# Altium PCB CPLD-V.PcbDoc (part 2 of 2)
Units mm, origin at the board's own origin, x right, y up, seen from the top; angles counter-clockwise.
Board outline 69.85 x 107.95 mm, 4 copper layers (Top Layer, Layer 1, Layer 2, Bottom Layer), stack 1.803 mm thick; 157 components, 164 nets, 714 pads, 232 vias.
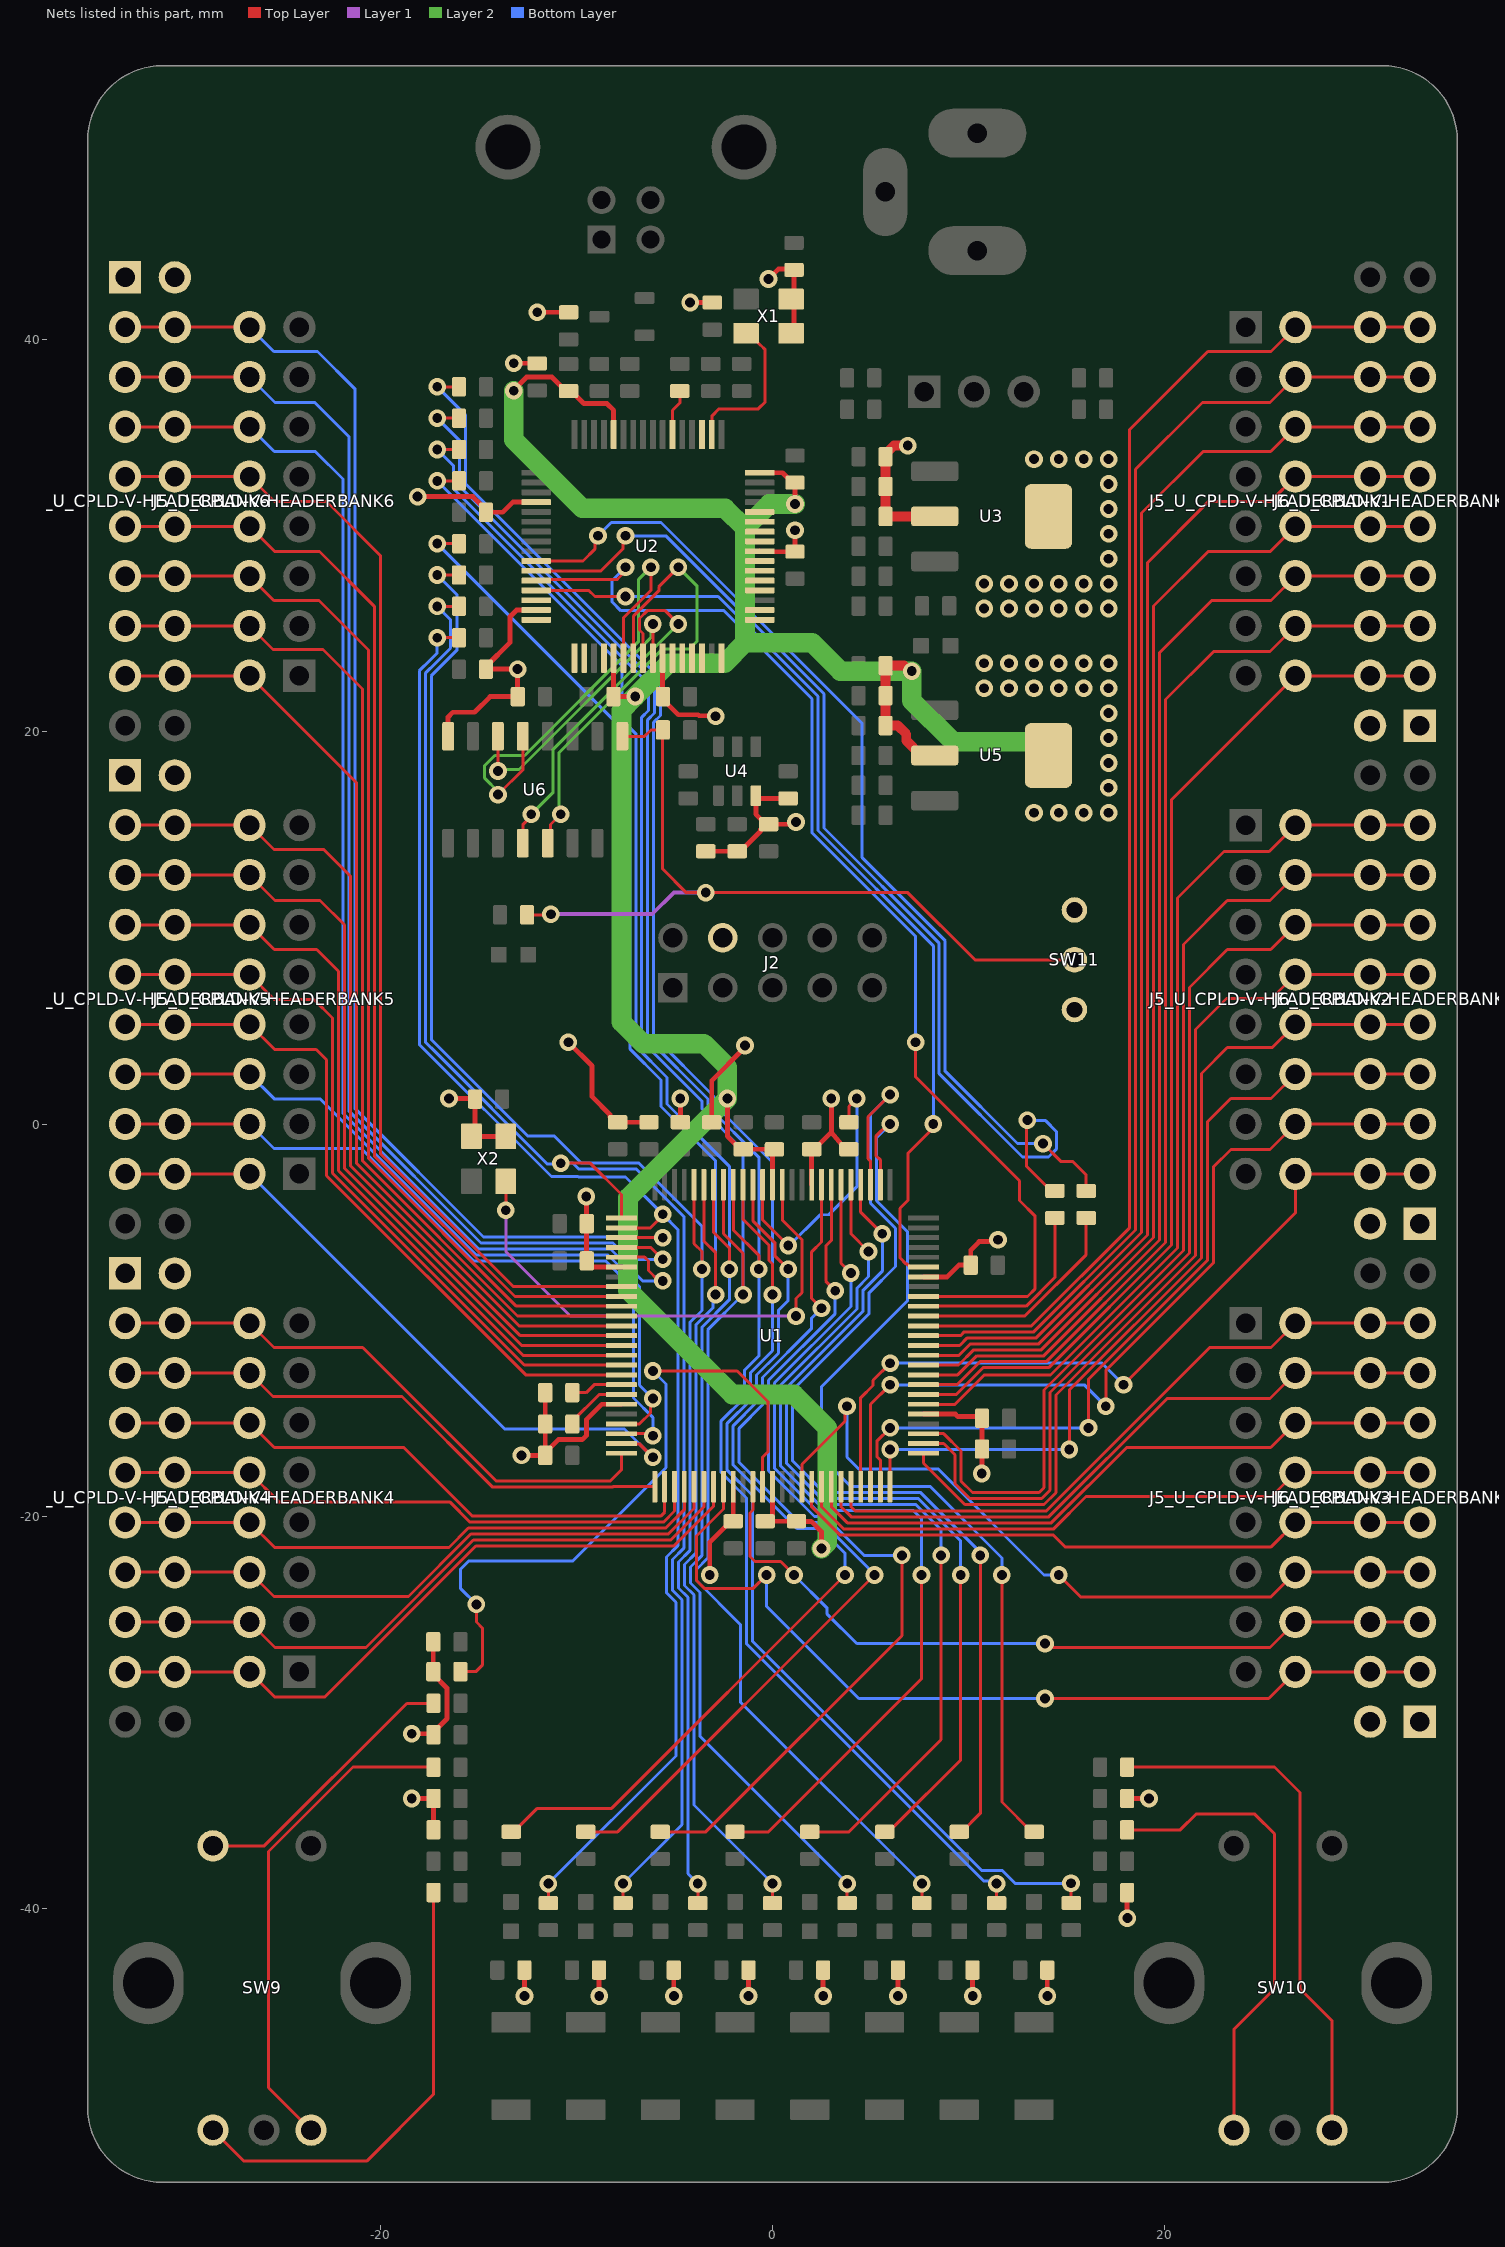
[diagram p4: the nets of this part, all layers, seen from the top]

## Via types
v1: diameter 0.9, hole 0.5, Top Layer to Bottom Layer, tented both sides, 189 vias
v2: diameter 0.9, hole 0.5, Top Layer to Bottom Layer, 43 vias

## Nets (pads, with @x,y where several pads share a name; then routed paths per layer and width w, separated by ;. In a path a pad name is that pad's centre, name@x,y a point inside that pad or via, vN(x,y) a via of type N, cw(c..) or ccw(c..) an arc to the next point about the centre after c; other vN are vias at no path point) (continued)
NetR40_1: R40.1 SW9.A | length 23.6
  Top Layer w0.153: SW9.A@-28.535,-51.315 -26.95,-52.9 -20.7,-52.9 -17.29,-49.49 R40.1@-17.29,-39.2
NetR41_1: R41.1 SW10.A | length 24.2
  Top Layer w0.153: R41.1@18.09,-36.001 20.799,-36.001 21.6,-35.2 24.6,-35.2 25.6,-36.2 25.6,-44.1 23.535,-46.165 SW10.A@23.535,-51.315
NetR42_1: R42.1 U1.62 | length 35.4
  Top Layer w0.152: R42.1@-15.92,-27.934 -15.134,-27.934 -14.8,-27.6 -14.8,-25.7 -15.1,-25.4 v2(-15.1,-24.5) ; v1(-6.1,-12.6) -1.8,-12.6 -0.222,-14.178 -0.222,-16.706 -0.5,-16.984 U1.62@-0.5,-18.495
  Bottom Layer w0.152: v2(-15.1,-24.5) -15.9,-23.7 -15.9,-22.7 -15.5,-22.3 -10.203,-22.3 -5.434,-17.531 -5.434,-17.293 -5.422,-17.281 -5.422,-13.719 -5.434,-13.707 -5.434,-13.266 v1(-6.1,-12.6)
NetR43_1: R43.1 U1.44 | length 3.2
  Top Layer w0.153: R43.1@-10.21,-15.3 -10.21,-15.165 -8.84,-13.795 U1.44@-7.7,-13.795
NetR44_1: R44.1 U1.43 | length 2.7
  Top Layer w0.153: R44.1@-10.21,-13.7 -9.5,-13.7 -9.095,-13.295 U1.43@-7.7,-13.295
NetR45_1: R45.1 R46.2 SW11.2 U6.9 | length 41.8
  Top Layer w0.153: R46.2@-12.518,10.668 -11.332,10.668 v1(-11.3,10.7) ; U6.9@-7.655,19.775 -6.525,19.775 -6.2,20.1 R45.1@-5.59,20.1 -5.6,20.09 -5.6,13 -4.4,11.8 v1(-3.4,11.8) 6.9,11.8 10.325,8.375 SW11.2@15.4,8.375
  Layer 1 w0.2: v1(-11.3,10.7) -6.131,10.7 -5.031,11.8 v1(-3.4,11.8)
NetR48_1: R48.1 U2.6 | length 2.4
  Top Layer w0.153: U2.6@-5.1,35.164 -5.1,36.4 -4.725,36.775 R48.1@-4.725,37.385
NetR49_1: R49.1 SW9.B | length 25.3
  Top Layer w0.153: SW9.B@-23.535,-51.315 -25.7,-49.15 -25.7,-37.1 -21.4,-32.8 R49.1@-17.29,-32.8
NetR50_1: R50.1 SW9.1 | length 14.3
  Top Layer w0.153: SW9.1@-28.535,-36.815 -25.915,-36.815 -18.9,-29.8 -18.65,-29.55 R50.1@-17.29,-29.55
NetR51_1: R51.1 SW10.B | length 27.2
  Top Layer w0.153: R51.1@18.09,-32.8 25.6,-32.8 26.9,-34.1 26.9,-44.1 28.535,-45.735 SW10.B@28.535,-51.315
NetR60_2: R60.2 U1.90 | length 11.5
  Top Layer w0.153: U1.90@7.7,-9.795 12.868,-9.795 16,-6.663 R60.2@16,-4.79
NetR61_2: R61.2 U1.91 | length 10.3
  Top Layer w0.153: U1.91@7.7,-9.295 12.936,-9.295 14.4,-7.831 R61.2@14.4,-4.79
NetR62_1: R62.1 U1.14 | length 14.3
  Top Layer w0.152: U1.14@-0.5,-3.095 -0.5,-4.9 v1(0.8,-6.2) ; R62.1@3.9,0.09 3.9,0.9 v1(4.3,1.3)
  Bottom Layer w0.152: v1(0.8,-6.2) 0.859,-6.2 2.431,-4.628 2.872,-4.628 4.3,-3.2 v1(4.3,1.3)
NetSW11_3: SW11.3
NetU1_12: U1.12 X2.3 | length 27
  Top Layer w0.152: X2.3@-13.603,-2.928 -13.6,-2.931 v1(-13.6,-4.4) ; U1.12@0.5,-3.095 0.5,-4.9 1.5,-5.9 1.5,-8.6 1.2,-8.9 v1(1.2,-9.8)
  Layer 1 w0.152: v1(-13.6,-4.4) -13.6,-6.5 -10.3,-9.8 v1(1.2,-9.8)
NetU2_2: U2.2 X1.3 | length 7.9
  Top Layer w0.153: U2.2@-3.1,35.164 -3.077,35.187 -3.077,36.123 -2.725,36.475 -0.725,36.475 -0.375,36.825 -0.375,39.493 -0.612,39.73 -0.63,39.73 -1.225,40.325 X1.3@-1.35,40.325
NetU2_3: U2.3
NetU2_30: U2.30
NetU2_32: U2.32
NetU2_33: U2.33
NetU2_34: U2.34
NetU2_36: U2.36
NetU2_43: U2.43
NetU2_44: U2.44
NetU2_45: U2.45
NetU2_46: U2.46
NetU2_48: U2.48
NetU2_49: U2.49
NetU2_50: U2.50
NetU2_52: U2.52
NetU2_53: U2.53
NetU2_54: U2.54
NetU2_55: U2.55
NetU2_57: U2.57
NetU2_58: U2.58
NetU2_59: U2.59
NetU2_60: U2.60
P1V8D: C1.1 C2.1 C3.1 C22.1 C23.1 C24.1 C25.1 C26.1 C27.1 C28.1 U1.13 U1.63 U2.12 U2.37 U2.64 U5.2 U5.4 | length 139.4
  Top Layer w0.25: v1(-13.2,37.4) -13.2,37.437 -12.537,38.1 -11.25,38.1 -10.535,37.385 C3.1@-10.4,37.385 -10.265,37.385 -9.628,36.748 -8.448,36.748 -8.1,36.4 U2.12@-8.1,35.164 ; v1(-2.3,1.3) -2.3,-0.625 -1.635,-1.29 C27.1@-1.5,-1.29 C26.1@0.1,-1.29 0,-1.39 U1.13@0,-3.095 ; U2.64@-0.65,33.214 0.511,33.214 1.015,32.71 C1.1@1.15,32.71 v1(1.15,31.622) ; C25.1@-0.375,-20.26 C25.1@-0.24,-20.26 ; U1.63@0,-18.495 0,-20.02 C25.1@-0.24,-20.26 ; v1(2.5,-21.65) 2.5,-20.791 1.975,-20.266 1.231,-20.266 C28.1@1.225,-20.26 C25.1@-0.24,-20.26
  Top Layer w0.254: C2.1@-8.105,21.805 -8.1,21.8 v1(-7,21.8) ; C2.1@-8.105,22.005 -8.105,23.759 U2.37@-8.1,23.764
  Top Layer w0.5: C24.1@5.77,23.1 C22.1@5.77,20.32 6.388,20.32 6.826,19.882 6.826,19.546 7.576,18.796 U5.2@8.276,18.796 ; C24.1@5.77,23.368 5.77,23.287 5.783,23.287 5.88,23.384 6.708,23.384 6.992,23.1 v1(7.1,23.1)
  Layer 2 w1: v1(-13.2,37.4) -13.2,34.9 -9.7,31.4 -2.414,31.4 -1.4,30.386 ; v1(1.15,31.622) -0.164,31.622 -1.4,30.386 ; v1(2.5,-21.65) 2.802,-21.348 2.802,-15.502 1.096,-13.796 -2.045,-13.796 -7.37,-8.472 -7.37,-3.77 v1(-2.3,1.3) -2.3,2.9 -3.5,4.1 -6.6,4.1 -7.7,5.2 -7.7,21.1 v1(-7,21.8) -5.304,23.496 -2.45,23.496 -1.4,24.546 ; 13.8,19.4 13.6,19.4 13.5,19.5 9.2,19.5 7.1,21.6 v1(7.1,23.1) 3.46,23.1 2.015,24.546 -1.4,24.546 ; -1.4,24.546 -1.4,30.386
  other v2: 13.335,15.875 14.605,15.875 15.875,15.875 17.145,15.875 17.145,17.145 17.145,18.415 17.145,19.685 17.145,20.955 10.795,22.225 12.065,22.225 13.335,22.225 14.605,22.225 15.875,22.225 17.145,22.225 10.795,23.495 12.065,23.495 13.335,23.495 14.605,23.495 15.875,23.495 17.145,23.495
P3V3D: C4.1 C5.1 C6.1 C7.1 C11.1 C15.1 C16.1 C17.1 C18.1 C29.1 C30.1 C31.1 C32.1 C33.1 C35.1 C36.1 C37.1 C44.1 C45.1 FB1.2 FB2.2 J2.4 J6_U_CPLD-V-HEADERBANK1.1 J6_U_CPLD-V-HEADERBANK1.2 J6_U_CPLD-V-HEADERBANK2.1 J6_U_CPLD-V-HEADERBANK2.2 J6_U_CPLD-V-HEADERBANK3.1 J6_U_CPLD-V-HEADERBANK3.2 J6_U_CPLD-V-HEADERBANK4.1 J6_U_CPLD-V-HEADERBANK4.2 J6_U_CPLD-V-HEADERBANK5.1 J6_U_CPLD-V-HEADERBANK5.2 J6_U_CPLD-V-HEADERBANK6.1 J6_U_CPLD-V-HEADERBANK6.2 R1.2 R2.1 R11.1 R12.1 R13.1 R14.1 R15.1 R16.1 R17.1 R18.1 R19.1 R20.1 R21.1 R23.1 R24.1 R25.1 R26.1 R35.1 R36.1 R37.1 R38.1 R39.1 R42.2 R43.2 R44.2 R62.2 SW11.1 U1.9 U1.31 U1.45 U1.59 U1.80 U1.94 U2.20 U2.31 U2.42 U2.56 U3.2 U3.4 U4.6 U6.16 X1.1 X1.4 X2.1 X2.4 | length 125.6
  Top Layer w0.153: C6.1@-5.6,22.01 C6.1@-5.59,22
  Top Layer w0.25: v1(-18.4,-34.4) R35.1@-17.29,-34.4 R36.1@-17.29,-36 ; v1(-18.4,-31.1) -17.34,-31.1 R37.1@-17.29,-31.15 -17.29,-31.015 -16.6,-30.325 -16.6,-28.769 -17.3,-28.069 R42.2@-17.3,-27.934 R1.2@-17.3,-26.41 ; v1(-18.1,32) -15.282,32 -14.901,31.619 -14.61,31.328 C4.1@-14.61,31.2 -13.757,31.2 -13.243,31.714 U2.20@-12.05,31.714 ; U6.16@-16.545,19.775 -16.545,20.755 -16.3,21 -15.2,21 -14.4,21.8 C44.1@-12.99,21.8 -13,21.81 v1(-13,23.2) C5.1@-14.605,23.2 ; v1(-16.5,1.3) -15.198,1.3 C45.1@-15.168,1.27 -15.168,-0.443 X2.1@-15.353,-0.628 X2.4@-13.603,-0.628 ; C5.1@-14.61,23.2 -14.61,23.335 -13.381,24.564 -13.381,25.883 -13.05,26.214 U2.31@-12.05,26.214 ; v1(-13.2,38.8) -12.01,38.8 R2.1@-12,38.79 ; v1(-12.8,-16.9) C31.1@-11.59,-16.9 ; v1@-12.66,-44.125 -12.657,-44.123 -12.657,-43.153 R14.1@-12.655,-43.15 ; v1(-12,41.4) FB1.2@-10.4,41.4 ; R44.2@-11.59,-13.7 -11.59,-16.765 -10.925,-16.1 -9.7,-16.1 -9.477,-15.877 -9.477,-15.062 -8.71,-14.295 U1.45@-7.7,-14.295 ; v1(-10.41,4.169) -9.2,2.959 -9.2,1.39 -8.295,0.485 -8.295,0.35 -8.035,0.09 R24.1@-7.9,0.09 R26.1@-6.3,0.09 ; v1(-9.5,-3.7) -9.485,-3.715 -9.485,-6.97 C30.1@-9.47,-6.985 ; C30.1@-9.47,-7.035 -9.21,-7.295 U1.31@-7.7,-7.295 ; v1@-8.85,-44.125 -8.847,-44.123 -8.847,-43.153 R15.1@-8.845,-43.15 ; C6.1@-5.6,22.01 U2.42@-5.6,23.764 ; C6.1@-5.59,21.8 -5.59,21.665 -4.975,21.05 -4.797,20.872 -3.788,20.872 -3.739,20.824 -3.6,20.824 -2.924,20.824 v1(-2.9,20.8) ; v1@-5.04,-44.125 -5.037,-44.123 -5.037,-43.153 R16.1@-5.035,-43.15 ; R25.1@-4.7,0.09 v1(-4.7,1.3) ; v1(-4.2,41.9) FB2.2@-3.075,41.9 ; R12.1@-3.4,13.91 -1.63,13.91 -0.61,14.93 -0.61,15.015 -0.335,15.29 -0.85,15.805 U4.6@-0.85,16.75 -0.71,16.61 R11.1@0.8,16.61 ; v1(-3.2,-23) -3.2,-21.325 -2.135,-20.26 C32.1@-2,-20.26 U1.59@-2,-18.495 ; R23.1@-3.1,0.09 -3.1,2.211 -1.4,3.911 v1(-1.4,4) ; v1@-1.23,-44.125 -1.227,-44.123 -1.227,-43.153 R17.1@-1.225,-43.15 ; U2.56@-0.65,29.214 -0.62,29.184 1.114,29.184 C7.1@1.143,29.155 ; C11.1@-0.2,15.29 0.99,15.29 1.1,15.4 v1(1.2,15.4) ; v1(-0.2,43.1) 0.3,43.6 1.06,43.6 C18.1@1.1,43.56 1.1,40.475 X1.4@0.95,40.325 ; C7.1@1.15,29.19 v1(1.15,30.278) ; U1.9@2,-3.095 C29.1@2,-1.29 2.135,-1.29 3,-0.425 ; v1@2.58,-44.125 2.583,-44.123 2.583,-43.153 R18.1@2.585,-43.15 ; v1(3,1.3) 3,-0.425 ; R62.2@3.9,-1.29 3.53,-1.055 3,-0.425 ; v1@6.39,-44.125 6.393,-44.123 6.393,-43.153 R19.1@6.395,-43.15 ; U1.80@7.7,-14.795 9.325,-14.795 9.448,-14.918 10.603,-14.918 C37.1@10.685,-15 C33.1@10.685,-16.575 10.685,-17.535 10.742,-17.592 10.742,-17.758 v1(10.675,-17.825) ; U1.94@7.7,-7.795 8.905,-7.795 9.5,-7.2 C35.1@10.11,-7.2 10.11,-6.43 10.54,-6 11.41,-6 11.5,-5.91 v1(11.5,-5.9) ; v1@10.2,-44.125 10.203,-44.123 10.203,-43.153 R20.1@10.205,-43.15 ; v1@14.01,-44.125 14.013,-44.123 14.013,-43.153 R21.1@14.015,-43.15 ; R39.1@18.09,-39.201 18.09,-40.5 v1(18.1,-40.5) ; R38.1@18.09,-34.401 19.199,-34.401 v1(19.2,-34.4)
  Top Layer w0.5: v1(6.9,34.6) 6.199,34.6 5.77,34.171 C16.1@5.77,32.512 C15.1@5.77,30.988 U3.2@8.276,30.988
  other v1: -12.65,-44.475 -8.84,-44.475 -5.03,-44.475 -1.22,-44.475 2.59,-44.475 6.4,-44.475 10.21,-44.475 14.02,-44.475
  other v2: 10.795,26.289 12.065,26.289 13.335,26.289 14.605,26.289 15.875,26.289 17.145,26.289 10.795,27.559 12.065,27.559 13.335,27.559 14.605,27.559 15.875,27.559 17.145,27.559 17.145,28.829 17.145,30.099 17.145,31.369 17.145,32.639 13.335,33.909 14.605,33.909 15.875,33.909 17.145,33.909
PIN2: R52.2 U1.2 | length 49.4
  Top Layer w0.153: U1.2@5.5,-3.095 5.5,-1.828 5.273,-1.601 5.273,-0.628 5.901,0 v1(6,0) ; v1(11.7,-23) 11.7,-34.583 13.215,-36.098 R52.2@13.35,-36.098
  Bottom Layer w0.153: v1(6,0) 5.3,-0.7 5.3,-3.909 6.879,-5.488 6.879,-9.021 2.49,-13.41 2.49,-16.979 4.009,-18.499 8.058,-18.499 11.7,-22.14 v1(11.7,-23)
PIN3: R53.2 U1.3 | length 53.2
  Top Layer w0.153: U1.3@5,-3.095 5,-1.899 4.869,-1.768 4.869,0.369 v1(6,1.5) ; R53.2@9.525,-36.098 9.66,-36.098 10.6,-35.158 v1(10.6,-22)
  Bottom Layer w0.153: v1(6,1.5) 4.995,0.495 4.995,-4.035 6.279,-5.319 6.279,-7.262 4.915,-8.625 4.915,-9.685 1.02,-13.58 1.02,-17.18 2.644,-18.804 7.568,-18.804 10.6,-21.835 v1(10.6,-22)
PIN4: R54.2 U1.4 | length 43.8
  Top Layer w0.153: U1.4@4.5,-3.095 4.5,-4.5 v1(5.6,-5.6) ; R54.2@5.725,-36.098 6,-35.823 6.215,-35.823 9.6,-32.438 v1(9.6,-23)
  Bottom Layer w0.153: v1(5.6,-5.6) 5.6,-7.509 4.61,-8.499 4.61,-9.559 0.715,-13.454 0.715,-17.306 2.518,-19.109 7.442,-19.109 9.6,-21.267 v1(9.6,-23)
PIN5: R55.2 U1.5 | length 45.5
  Top Layer w0.153: R55.2@1.9,-36.098 3.902,-36.098 8.6,-31.4 v1(8.6,-22) ; U1.5@4,-3.095 4,-5.6 v1(4.9,-6.5)
  Bottom Layer w0.153: v1(4.9,-6.5) 4.9,-7.778 4.305,-8.373 4.305,-9.432 0.41,-13.327 0.41,-17.432 2.391,-19.414 7.316,-19.414 8.6,-20.698 v1(8.6,-22)
PIN6: R56.2 U1.6 | length 45.8
  Top Layer w0.153: R56.2@-1.912,-36.098 -0.198,-36.098 7.6,-28.3 v1(7.6,-23) ; U1.6@3.5,-3.095 3.5,-7.1 v1(4,-7.6)
  Bottom Layer w0.153: v1(4,-7.6) 4,-9.306 0.105,-13.201 0.105,-17.559 2.265,-19.719 7.189,-19.719 7.6,-20.129 v1(7.6,-23)
PIN7: R57.2 U1.7 | length 45.5
  Top Layer w0.153: R57.2@-5.725,-36.098 -3.398,-36.098 6.6,-26.1 v1(6.6,-22) ; U1.7@3,-3.095 3,-5.947 2.721,-6.226 2.721,-8.018 3.2,-8.496 v1(3.2,-8.5)
  Bottom Layer w0.153: v1(3.2,-8.5) 3.2,-9.675 -0.2,-13.075 -0.2,-17.685 2.139,-20.024 2.696,-20.024 4.672,-22 v1(6.6,-22)
PIN8: R58.2 U1.8 | length 45.8
  Top Layer w0.153: R58.2@-9.525,-36.098 -7.898,-36.098 v1(5.2,-23) ; v1(2.5,-9.4) 2,-8.9 2,-6.516 2.5,-6.016 U1.8@2.5,-3.095
  Bottom Layer w0.153: v1(2.5,-9.4) 2,-9.9 2,-10.423 -0.505,-12.928 -0.505,-14.324 -1.7,-15.519 -1.7,-17.26 1.369,-20.329 2.569,-20.329 5.2,-22.959 v1(5.2,-23)
PIN15: R59.2 U1.15 | length 47.3
  Top Layer w0.153: R59.2@-13.325,-36.098 -13.19,-36.098 -11.992,-34.9 -8.2,-34.9 v1(3.7,-23) ; U1.15@-1,-3.095 -1,-4.931 0.121,-6.052 0.121,-6.721 v1(0.8,-7.4)
  Bottom Layer w0.153: v1(0.8,-7.4) 0.8,-9 0.305,-9.495 0.305,-11.687 -0.81,-12.802 -0.81,-14.198 -2.005,-15.393 -2.005,-17.386 -1.874,-17.517 1.243,-20.634 2.443,-20.634 3.7,-21.89 v1(3.7,-23)
PIN16: R3.2 R27.2 U1.16 | length 102.6
  Top Layer w0.153: v1(-17.1,37.6) R27.2@-15.99,37.6 ; U1.16@-1.5,-3.095 -1.5,-4.862 -0.184,-6.179 -0.184,-6.957 0,-7.14 v1(0,-8.7) ; v1(15.225,-38.725) 15.225,-39.72 R3.2@15.24,-39.735
  Bottom Layer w0.153: v1(-17.1,37.6) -15.647,36.147 -15.647,32.641 -5.711,22.705 -5.711,20.837 -6.059,20.49 -6.059,4.481 -2.979,1.401 -2.979,1.019 0,-1.96 0,-11.56 -1.115,-12.675 -1.115,-14.071 -2.31,-15.266 -2.31,-17.653 -1.016,-18.947 -1.016,-26.384 10.662,-38.062 11.711,-38.062 12.375,-38.725 v1(15.225,-38.725)
PIN17: R4.2 R28.2 U1.17 | length 95.7
  Top Layer w0.153: v1(-17.1,36) R28.2@-15.99,36 ; U1.17@-2,-3.095 -2,-5.401 -0.7,-6.701 v1(-0.7,-7.4) ; R4.2@11.43,-39.735 v1(11.43,-38.74)
  Bottom Layer w0.153: v1(-17.1,36) -15.952,34.852 -15.952,32.515 -6.016,22.579 -6.016,20.963 -6.364,20.616 -6.364,4.354 -3.284,1.274 -3.284,0.893 -0.7,-1.691 -0.7,-11.829 -1.42,-12.549 -1.42,-13.945 -2.615,-15.14 -2.615,-17.779 -1.321,-19.073 -1.321,-26.51 10.766,-38.597 11.287,-38.597 v1(11.43,-38.74)
PIN18: R5.2 R29.2 U1.18 | length 93.8
  Top Layer w0.153: v1(-17.1,34.4) R29.2@-15.99,34.4 ; U1.18@-2.5,-3.095 -2.5,-5.597 -1.5,-6.597 v1(-1.5,-8.7) ; R5.2@7.62,-39.735 v1(7.62,-38.74)
  Bottom Layer w0.153: v1(-17.1,34.4) -16.257,33.557 -16.257,32.388 -6.321,22.453 -6.321,21.09 -6.669,20.743 -6.669,4.228 -3.589,1.148 -3.589,0.766 -1.5,-1.322 v1(-1.5,-8.7) -3.3,-10.5 -3.3,-12.823 -3.288,-12.835 -3.288,-18.165 -3.3,-18.177 -3.3,-22.14 -3.879,-22.719 -3.879,-23.281 -1.626,-25.533 -1.626,-29.494 v1(7.62,-38.74)
PIN19: R6.2 R30.2 U1.19 | length 88.6
  Top Layer w0.153: v1(-17.1,32.8) R30.2@-15.99,32.8 ; U1.19@-3,-3.095 -3,-5.529 -2.2,-6.329 v1(-2.2,-7.4) ; R6.2@3.81,-39.735 v1(3.81,-38.74)
  Bottom Layer w0.153: v1(-17.1,32.8) -7.679,23.378 -7.679,20.61 -6.974,19.905 -6.974,3.964 -5.379,2.369 -5.379,1.019 -2.2,-2.16 -2.2,-8.969 -3.605,-10.374 -3.605,-12.949 -3.593,-12.961 -3.593,-18.039 -3.605,-18.051 -3.605,-22.014 -4.184,-22.593 -4.184,-23.407 -3.701,-23.889 -3.701,-31.229 v1(3.81,-38.74)
PIN20: R7.2 R31.2 U1.20 | length 84.7
  Top Layer w0.153: v1(-17.1,29.6) R31.2@-15.99,29.6 ; U1.20@-3.5,-3.095 -3.5,-5.971 -2.9,-6.571 v1(-2.9,-8.7) ; R7.2@0,-39.735 v1(0,-38.74)
  Bottom Layer w0.153: v1(-17.1,29.6) -7.279,19.778 -7.279,3.838 -5.684,2.243 -5.684,0.893 -2.9,-1.891 v1(-2.9,-8.7) -3.042,-8.842 -3.042,-9.38 -3.91,-10.247 -3.91,-13.075 -3.898,-13.088 -3.898,-17.912 -3.91,-17.925 -3.91,-21.888 -4.489,-22.466 -4.489,-23.534 -4.006,-24.016 -4.006,-34.734 v1(0,-38.74)
PIN21: R8.2 R32.2 U1.21 | length 83.4
  Top Layer w0.153: v1(-17.1,28) R32.2@-15.99,28 ; U1.21@-4,-3.095 -3.997,-3.097 -3.997,-6.101 -3.6,-6.499 v1(-3.6,-7.4) ; R8.2@-3.81,-39.735 v1(-3.81,-38.74)
  Bottom Layer w0.153: v1(-17.1,28) -16.1,27 -16.1,24.16 -17.4,22.86 -17.4,4.311 -12.467,-0.622 -11.115,-0.622 -9.737,-2 -6.809,-2 -3.6,-5.209 v1(-3.6,-7.4) -3.6,-9.506 -4.215,-10.121 -4.215,-13.202 -4.203,-13.214 -4.203,-17.786 -4.215,-17.798 -4.215,-21.761 -4.794,-22.34 -4.794,-23.66 -4.311,-24.142 -4.311,-38.239 v1(-3.81,-38.74)
PIN26: R9.2 R33.2 U1.26 | length 82.7
  Top Layer w0.153: v1(-17.1,26.4) R33.2@-15.99,26.4 ; v1(-10.8,-2) -9.3,-2 -7.7,-3.6 U1.26@-7.7,-4.795 ; R9.2@-7.62,-39.735 v1(-7.62,-38.74)
  Bottom Layer w0.153: v1(-17.1,26.4) -16.421,25.721 -16.421,24.27 -17.15,23.542 -17.705,22.987 -17.705,4.184 -17.15,3.629 -11.473,-2.048 v1@-10.8,-2.048 ; v1(-10.8,-2) -10.169,-2 -9.864,-2.305 -6.935,-2.305 -4.52,-4.72 -4.52,-13.328 -4.508,-13.34 -4.508,-17.66 -4.52,-17.672 -4.52,-21.635 -5.099,-22.214 -5.099,-23.786 -4.616,-24.268 -4.616,-35.737 v1(-7.62,-38.74)
PIN27: R10.2 R34.2 U1.27 | length 79.3
  Top Layer w0.153: v1(-17.1,24.8) R34.2@-15.99,24.8 ; R10.2@-11.43,-39.735 v1(-11.43,-38.74) ; U1.27@-7.7,-5.295 -6.22,-5.295 -5.6,-4.675 v1(-5.6,-4.6)
  Bottom Layer w0.153: v1(-17.1,24.8) -17.1,24.023 -17.455,23.668 -18.01,23.113 -18.01,4.058 -11.274,-2.679 -9.921,-2.679 -9.9,-2.7 -7.5,-2.7 v1(-5.6,-4.6) -4.825,-5.375 -4.825,-13.454 -4.813,-13.467 -4.813,-17.533 -4.825,-17.546 -4.825,-21.509 -5.404,-22.087 -5.404,-23.913 -4.921,-24.395 -4.921,-32.231 v1(-11.43,-38.74)
PIN28: J5_U_CPLD-V-HEADERBANK6.16 J6_U_CPLD-V-HEADERBANK6.3 J6_U_CPLD-V-HEADERBANK6.4 U1.28 | length 70.3
  Top Layer w0.153: J6_U_CPLD-V-HEADERBANK6.3@-33.02,40.64 J6_U_CPLD-V-HEADERBANK6.4@-30.48,40.64 J5_U_CPLD-V-HEADERBANK6.16@-26.67,40.64 ; U1.28@-7.7,-5.795 -7.698,-5.797 -5.603,-5.797 v1(-5.6,-5.8)
  Bottom Layer w0.153: J5_U_CPLD-V-HEADERBANK6.16@-26.67,40.64 -25.43,39.4 -23.2,39.4 -21.3,37.5 -21.3,0.8 -14.735,-5.765 -8.005,-5.765 -7.97,-5.8 v1(-5.6,-5.8)
PIN29: J5_U_CPLD-V-HEADERBANK6.14 J6_U_CPLD-V-HEADERBANK6.5 J6_U_CPLD-V-HEADERBANK6.6 U1.29 | length 68.6
  Top Layer w0.153: J6_U_CPLD-V-HEADERBANK6.5@-33.02,38.1 J6_U_CPLD-V-HEADERBANK6.6@-30.48,38.1 J5_U_CPLD-V-HEADERBANK6.14@-26.67,38.1 ; U1.29@-7.7,-6.295 -6.205,-6.295 v1(-5.6,-6.9)
  Bottom Layer w0.153: J5_U_CPLD-V-HEADERBANK6.14@-26.67,38.1 -25.37,36.8 -23.343,36.8 -21.605,35.062 -21.605,0.674 -14.861,-6.07 -8.131,-6.07 -7.301,-6.9 v1(-5.6,-6.9)
PIN30: J5_U_CPLD-V-HEADERBANK6.12 J6_U_CPLD-V-HEADERBANK6.7 J6_U_CPLD-V-HEADERBANK6.8 U1.30 | length 67.3
  Top Layer w0.153: J6_U_CPLD-V-HEADERBANK6.7@-33.02,35.56 J5_U_CPLD-V-HEADERBANK6.12@-26.67,35.56 ; U1.30@-7.7,-6.795 -6.519,-6.795 -6.327,-6.987 -6.327,-7.473 -5.8,-8 v1(-5.6,-8)
  Bottom Layer w0.153: J5_U_CPLD-V-HEADERBANK6.12@-26.67,35.56 -25.41,34.3 -23.319,34.3 -21.91,32.891 -21.91,0.547 -14.988,-6.375 -8.257,-6.375 -6.632,-8 v1(-5.6,-8)
PIN33: J5_U_CPLD-V-HEADERBANK6.10 J6_U_CPLD-V-HEADERBANK6.9 J6_U_CPLD-V-HEADERBANK6.10 U1.33 | length 60.3
  Top Layer w0.153: J6_U_CPLD-V-HEADERBANK6.9@-33.02,33.02 J6_U_CPLD-V-HEADERBANK6.10@-30.48,33.02 J5_U_CPLD-V-HEADERBANK6.10@-26.67,33.02 -25.393,31.744 -22.744,31.744 -20,29 -20,-1.5 -13.205,-8.295 U1.33@-7.7,-8.295
PIN34: J5_U_CPLD-V-HEADERBANK6.8 J6_U_CPLD-V-HEADERBANK6.11 J6_U_CPLD-V-HEADERBANK6.12 U1.34 | length 58
  Top Layer w0.153: J6_U_CPLD-V-HEADERBANK6.11@-33.02,30.48 J6_U_CPLD-V-HEADERBANK6.12@-30.48,30.48 J5_U_CPLD-V-HEADERBANK6.8@-26.67,30.48 -25.39,29.2 -23.1,29.2 -20.305,26.405 -20.305,-1.626 -13.136,-8.795 U1.34@-7.7,-8.795
PIN35: J5_U_CPLD-V-HEADERBANK6.6 J6_U_CPLD-V-HEADERBANK6.13 J6_U_CPLD-V-HEADERBANK6.14 U1.35 | length 55.3
  Top Layer w0.153: J6_U_CPLD-V-HEADERBANK6.13@-33.02,27.94 J6_U_CPLD-V-HEADERBANK6.14@-30.48,27.94 J5_U_CPLD-V-HEADERBANK6.6@-26.67,27.94 -25.43,26.7 -23.134,26.7 -20.61,24.176 -20.61,-1.753 -13.068,-9.295 U1.35@-8.373,-9.295
PIN36: J5_U_CPLD-V-HEADERBANK6.4 J6_U_CPLD-V-HEADERBANK6.15 J6_U_CPLD-V-HEADERBANK6.16 U1.36 | length 54
  Top Layer w0.153: J6_U_CPLD-V-HEADERBANK6.15@-33.02,25.4 J6_U_CPLD-V-HEADERBANK6.16@-30.48,25.4 J5_U_CPLD-V-HEADERBANK6.4@-26.67,25.4 -25.47,24.2 -22.924,24.2 -20.915,22.191 -20.915,-1.879 -12.999,-9.795 U1.36@-7.7,-9.795
PIN37: J5_U_CPLD-V-HEADERBANK6.2 J6_U_CPLD-V-HEADERBANK6.17 J6_U_CPLD-V-HEADERBANK6.18 U1.37 | length 50.4
  Top Layer w0.153: J6_U_CPLD-V-HEADERBANK6.17@-33.02,22.86 J6_U_CPLD-V-HEADERBANK6.18@-30.48,22.86 J5_U_CPLD-V-HEADERBANK6.2@-26.67,22.86 -21.22,17.41 -21.22,-2.005 -12.93,-10.295 U1.37@-7.7,-10.295
PIN38: J5_U_CPLD-V-HEADERBANK5.16 J6_U_CPLD-V-HEADERBANK5.3 J6_U_CPLD-V-HEADERBANK5.4 U1.38 | length 44.8
  Top Layer w0.153: J6_U_CPLD-V-HEADERBANK5.3@-33.02,15.24 J6_U_CPLD-V-HEADERBANK5.4@-30.48,15.24 J5_U_CPLD-V-HEADERBANK5.16@-26.67,15.24 -25.43,14 -22.884,14 -21.525,12.641 -21.525,-2.132 -12.862,-10.795 U1.38@-7.7,-10.795
PIN39: J5_U_CPLD-V-HEADERBANK5.14 J6_U_CPLD-V-HEADERBANK5.5 J6_U_CPLD-V-HEADERBANK5.6 U1.39 | length 42.5
  Top Layer w0.153: J6_U_CPLD-V-HEADERBANK5.5@-33.02,12.7 J6_U_CPLD-V-HEADERBANK5.6@-30.48,12.7 J5_U_CPLD-V-HEADERBANK5.14@-26.67,12.7 -25.37,11.4 -23.074,11.4 -21.83,10.156 -21.83,-2.258 -12.793,-11.295 U1.39@-7.7,-11.295
PIN40: J5_U_CPLD-V-HEADERBANK5.12 J6_U_CPLD-V-HEADERBANK5.7 J6_U_CPLD-V-HEADERBANK5.8 U1.40 | length 40.4
  Top Layer w0.153: J6_U_CPLD-V-HEADERBANK5.7@-33.02,10.16 J6_U_CPLD-V-HEADERBANK5.8@-30.48,10.16 J5_U_CPLD-V-HEADERBANK5.12@-26.67,10.16 -25.41,8.9 -23.249,8.9 -22.135,7.786 -22.135,-2.384 -12.724,-11.795 U1.40@-7.7,-11.795
PIN41: J5_U_CPLD-V-HEADERBANK5.10 J6_U_CPLD-V-HEADERBANK5.9 J6_U_CPLD-V-HEADERBANK5.10 U1.41 | length 38.2
  Top Layer w0.153: J6_U_CPLD-V-HEADERBANK5.9@-33.02,7.62 J6_U_CPLD-V-HEADERBANK5.10@-30.48,7.62 J5_U_CPLD-V-HEADERBANK5.10@-26.67,7.62 -25.393,6.344 -23.372,6.344 -22.44,5.411 -22.44,-2.511 -12.656,-12.295 U1.41@-7.7,-12.295
PIN42: J5_U_CPLD-V-HEADERBANK5.8 J6_U_CPLD-V-HEADERBANK5.11 J6_U_CPLD-V-HEADERBANK5.12 U1.42 | length 36.2
  Top Layer w0.153: J6_U_CPLD-V-HEADERBANK5.11@-33.02,5.08 J6_U_CPLD-V-HEADERBANK5.12@-30.48,5.08 J5_U_CPLD-V-HEADERBANK5.8@-26.67,5.08 -25.39,3.8 -23.27,3.8 -22.745,3.275 -22.745,-2.637 -12.587,-12.795 U1.42@-7.7,-12.795
PIN47: J5_U_CPLD-V-HEADERBANK5.6 J6_U_CPLD-V-HEADERBANK5.13 J6_U_CPLD-V-HEADERBANK5.14 U1.47 | length 39.2
  Top Layer w0.153: J6_U_CPLD-V-HEADERBANK5.13@-33.02,2.54 J5_U_CPLD-V-HEADERBANK5.6@-26.67,2.54 ; U1.47@-7.7,-15.295 -7.696,-15.291 -6.78,-15.291 -6.224,-14.735 -6.224,-14.124 v1(-6.1,-14)
  Bottom Layer w0.153: J5_U_CPLD-V-HEADERBANK5.6@-26.67,2.54 -25.412,1.283 -23.077,1.283 -15.114,-6.68 -9.934,-6.68 -8.384,-6.68 -6.779,-8.285 -6.779,-13.321 v1(-6.1,-14)
PIN48: J5_U_CPLD-V-HEADERBANK5.4 J6_U_CPLD-V-HEADERBANK5.15 J6_U_CPLD-V-HEADERBANK5.16 U1.48 | length 39
  Top Layer w0.153: J6_U_CPLD-V-HEADERBANK5.15@-33.02,0 J5_U_CPLD-V-HEADERBANK5.4@-26.67,0 ; U1.48@-7.7,-15.795 -7.698,-15.797 -6.203,-15.797 v1(-6.1,-15.9)
  Bottom Layer w0.153: J5_U_CPLD-V-HEADERBANK5.4@-26.67,0 -25.42,-1.249 -20.976,-1.249 -15.24,-6.985 -8.51,-6.985 -7.084,-8.411 -7.084,-13.976 -6.1,-14.96 v1(-6.1,-15.9)
PIN49: J5_U_CPLD-V-HEADERBANK5.2 J6_U_CPLD-V-HEADERBANK5.17 J6_U_CPLD-V-HEADERBANK5.18 U1.49 | length 34.8
  Top Layer w0.153: J6_U_CPLD-V-HEADERBANK5.17@-33.02,-2.54 J5_U_CPLD-V-HEADERBANK5.2@-26.67,-2.54 ; U1.49@-7.7,-16.295 -7.685,-16.31 -6.79,-16.31 v1(-6.1,-17)
  Bottom Layer w0.153: J5_U_CPLD-V-HEADERBANK5.2@-26.67,-2.54 -13.66,-15.55 -7.55,-15.55 v1(-6.1,-17)
PIN50: J5_U_CPLD-V-HEADERBANK4.16 J6_U_CPLD-V-HEADERBANK4.3 J6_U_CPLD-V-HEADERBANK4.4 U1.50 | length 29.7
  Top Layer w0.153: J6_U_CPLD-V-HEADERBANK4.3@-33.02,-10.16 J6_U_CPLD-V-HEADERBANK4.4@-30.48,-10.16 J5_U_CPLD-V-HEADERBANK4.16@-26.67,-10.16 -25.43,-11.4 -20.9,-11.4 -14.1,-18.2 -8.263,-18.2 -7.7,-17.637 U1.50@-7.7,-16.795
PIN51: J5_U_CPLD-V-HEADERBANK4.14 J6_U_CPLD-V-HEADERBANK4.5 J6_U_CPLD-V-HEADERBANK4.6 U1.51 | length 29.4
  Top Layer w0.153: J6_U_CPLD-V-HEADERBANK4.5@-33.02,-12.7 J6_U_CPLD-V-HEADERBANK4.6@-30.48,-12.7 J5_U_CPLD-V-HEADERBANK4.14@-26.67,-12.7 -25.47,-13.9 -18.9,-13.9 -14.295,-18.505 -8.137,-18.505 -8.127,-18.495 U1.51@-6,-18.495
PIN52: J5_U_CPLD-V-HEADERBANK4.12 J6_U_CPLD-V-HEADERBANK4.7 J6_U_CPLD-V-HEADERBANK4.8 U1.52 | length 30.9
  Top Layer w0.153: J6_U_CPLD-V-HEADERBANK4.7@-33.02,-15.24 J6_U_CPLD-V-HEADERBANK4.8@-30.48,-15.24 J5_U_CPLD-V-HEADERBANK4.12@-26.67,-15.24 -25.41,-16.5 -18.8,-16.5 -15.3,-20 -5.7,-20 -5.5,-19.8 U1.52@-5.5,-18.495
PIN53: J5_U_CPLD-V-HEADERBANK4.10 J6_U_CPLD-V-HEADERBANK4.9 J6_U_CPLD-V-HEADERBANK4.10 U1.53 | length 29.9
  Top Layer w0.153: J6_U_CPLD-V-HEADERBANK4.9@-33.02,-17.78 J6_U_CPLD-V-HEADERBANK4.10@-30.48,-17.78 J5_U_CPLD-V-HEADERBANK4.10@-26.67,-17.78 -25.183,-19.266 -16.465,-19.266 -15.426,-20.305 -5.563,-20.305 -5,-19.742 U1.53@-5,-19.168
PIN54: J5_U_CPLD-V-HEADERBANK4.8 J6_U_CPLD-V-HEADERBANK4.11 J6_U_CPLD-V-HEADERBANK4.12 U1.54 | length 31
  Top Layer w0.153: J6_U_CPLD-V-HEADERBANK4.11@-33.02,-20.32 J6_U_CPLD-V-HEADERBANK4.12@-30.48,-20.32 J5_U_CPLD-V-HEADERBANK4.8@-26.67,-20.32 -25.39,-21.6 -16.5,-21.6 -15.51,-20.61 -5.437,-20.61 -4.5,-19.673 U1.54@-4.5,-18.495
PIN55: J5_U_CPLD-V-HEADERBANK4.6 J6_U_CPLD-V-HEADERBANK4.13 J6_U_CPLD-V-HEADERBANK4.14 U1.55 | length 31.8
  Top Layer w0.153: J6_U_CPLD-V-HEADERBANK4.13@-33.02,-22.86 J6_U_CPLD-V-HEADERBANK4.14@-30.48,-22.86 J5_U_CPLD-V-HEADERBANK4.6@-26.67,-22.86 -25.43,-24.1 -18.569,-24.1 -15.384,-20.915 -5.311,-20.915 -4,-19.604 U1.55@-4,-19.171
PIN56: J5_U_CPLD-V-HEADERBANK4.4 J6_U_CPLD-V-HEADERBANK4.15 J6_U_CPLD-V-HEADERBANK4.16 U1.56 | length 34.1
  Top Layer w0.153: J6_U_CPLD-V-HEADERBANK4.15@-33.02,-25.4 J6_U_CPLD-V-HEADERBANK4.16@-30.48,-25.4 J5_U_CPLD-V-HEADERBANK4.4@-26.67,-25.4 -25.37,-26.7 -20.737,-26.7 -15.257,-21.22 -5.184,-21.22 -3.5,-19.536 U1.56@-3.5,-18.495
PIN57: J5_U_CPLD-V-HEADERBANK4.2 J6_U_CPLD-V-HEADERBANK4.17 J6_U_CPLD-V-HEADERBANK4.18 U1.57 | length 35.6
  Top Layer w0.153: J6_U_CPLD-V-HEADERBANK4.17@-33.02,-27.94 J6_U_CPLD-V-HEADERBANK4.18@-30.48,-27.94 J5_U_CPLD-V-HEADERBANK4.2@-26.67,-27.94 -25.395,-29.215 -22.821,-29.215 -15.131,-21.525 -5.03,-21.525 -3.003,-19.497 -3.003,-18.497 U1.57@-3,-18.495
PIN58: J5_U_CPLD-V-HEADERBANK3.16 J6_U_CPLD-V-HEADERBANK3.3 J6_U_CPLD-V-HEADERBANK3.4 U1.58 | length 46.8
  Top Layer w0.153: U1.58@-2.5,-18.495 -2.502,-18.498 -2.502,-19.637 -3.879,-21.013 -3.879,-23.281 -3.481,-23.679 -0.979,-23.679 v1(-0.3,-23) ; v1(13.9,-29.3) 25.31,-29.3 J5_U_CPLD-V-HEADERBANK3.16@26.67,-27.94 J6_U_CPLD-V-HEADERBANK3.4@30.48,-27.94 J6_U_CPLD-V-HEADERBANK3.3@33.02,-27.94
  Bottom Layer w0.153: v1(-0.3,-23) -0.3,-24.6 4.4,-29.3 v1(13.9,-29.3)
PIN61: J5_U_CPLD-V-HEADERBANK3.14 J6_U_CPLD-V-HEADERBANK3.5 J6_U_CPLD-V-HEADERBANK3.6 U1.61 | length 40.4
  Top Layer w0.153: U1.61@-1,-18.495 -1,-19.691 -1.147,-19.838 -1.147,-22.062 -0.892,-22.317 0.417,-22.317 v1(1.1,-23) ; v1(13.9,-26.5) 14.102,-26.5 14.302,-26.7 25.37,-26.7 J5_U_CPLD-V-HEADERBANK3.14@26.67,-25.4 J6_U_CPLD-V-HEADERBANK3.6@30.48,-25.4 J6_U_CPLD-V-HEADERBANK3.5@33.02,-25.4
  Bottom Layer w0.153: v1(1.1,-23) 2.771,-24.671 2.771,-24.971 4.3,-26.5 v1(13.9,-26.5)
PIN66: J5_U_CPLD-V-HEADERBANK3.12 J6_U_CPLD-V-HEADERBANK3.7 J6_U_CPLD-V-HEADERBANK3.8 U1.66 | length 40.3
  Top Layer w0.153: U1.66@1.5,-18.495 1.5,-17.36 3.704,-15.156 3.704,-14.496 v1(3.8,-14.4) ; v1(14.6,-23) 15.735,-24.135 25.395,-24.135 J5_U_CPLD-V-HEADERBANK3.12@26.67,-22.86 J6_U_CPLD-V-HEADERBANK3.8@30.48,-22.86 J6_U_CPLD-V-HEADERBANK3.7@33.02,-22.86
  Bottom Layer w0.153: v1(3.8,-14.4) 3.8,-16.995 4.388,-17.584 8.437,-17.584 13.854,-23 v1(14.6,-23)
PIN67: J5_U_CPLD-V-HEADERBANK3.10 J6_U_CPLD-V-HEADERBANK3.9 J6_U_CPLD-V-HEADERBANK3.10 U1.67 | length 33.4
  Top Layer w0.153: U1.67@2,-18.495 2,-19.524 3.426,-20.95 14.309,-20.95 14.943,-21.584 25.406,-21.584 J5_U_CPLD-V-HEADERBANK3.10@26.67,-20.32 J6_U_CPLD-V-HEADERBANK3.10@30.48,-20.32 J6_U_CPLD-V-HEADERBANK3.9@33.02,-20.32
PIN68: J5_U_CPLD-V-HEADERBANK3.8 J6_U_CPLD-V-HEADERBANK3.11 J6_U_CPLD-V-HEADERBANK3.12 U1.68 | length 33.2
  Top Layer w0.153: U1.68@2.5,-18.495 2.5,-19.524 3.621,-20.645 14.349,-20.645 15.994,-19 25.45,-19 J5_U_CPLD-V-HEADERBANK3.8@26.67,-17.78 J6_U_CPLD-V-HEADERBANK3.12@30.48,-17.78 J6_U_CPLD-V-HEADERBANK3.11@33.02,-17.78
PIN69: J5_U_CPLD-V-HEADERBANK3.6 J6_U_CPLD-V-HEADERBANK3.13 J6_U_CPLD-V-HEADERBANK3.14 U1.69 | length 33.5
  Top Layer w0.153: U1.69@3,-18.495 3,-19.524 3.816,-20.34 14.223,-20.34 18.063,-16.5 25.41,-16.5 J5_U_CPLD-V-HEADERBANK3.6@26.67,-15.24 J6_U_CPLD-V-HEADERBANK3.14@30.48,-15.24 J6_U_CPLD-V-HEADERBANK3.13@33.02,-15.24
PIN70: J5_U_CPLD-V-HEADERBANK3.4 J6_U_CPLD-V-HEADERBANK3.15 J6_U_CPLD-V-HEADERBANK3.16 U1.70 | length 33.8
  Top Layer w0.153: U1.70@3.5,-18.495 3.5,-19.524 4.011,-20.035 14.096,-20.035 20.131,-14 25.37,-14 J5_U_CPLD-V-HEADERBANK3.4@26.67,-12.7 J6_U_CPLD-V-HEADERBANK3.16@30.48,-12.7 J6_U_CPLD-V-HEADERBANK3.15@33.02,-12.7
PIN71: J5_U_CPLD-V-HEADERBANK3.2 J6_U_CPLD-V-HEADERBANK3.17 J6_U_CPLD-V-HEADERBANK3.18 U1.71 | length 34.1
  Top Layer w0.153: U1.71@4,-18.495 4,-19.525 4.206,-19.73 13.97,-19.73 22.3,-11.4 25.43,-11.4 J5_U_CPLD-V-HEADERBANK3.2@26.67,-10.16 J6_U_CPLD-V-HEADERBANK3.18@30.48,-10.16 J6_U_CPLD-V-HEADERBANK3.17@33.02,-10.16
PIN72: J5_U_CPLD-V-HEADERBANK2.16 J6_U_CPLD-V-HEADERBANK2.3 J6_U_CPLD-V-HEADERBANK2.4 U1.72 | length 40
  Top Layer w0.153: U1.72@4.5,-18.495 4.5,-13.96 5.128,-13.332 5.128,-13.072 v1(6,-12.2) ; v1(17.9,-13.3) 26.67,-4.53 J5_U_CPLD-V-HEADERBANK2.16@26.67,-2.54 J6_U_CPLD-V-HEADERBANK2.4@30.48,-2.54 J6_U_CPLD-V-HEADERBANK2.3@33.02,-2.54
  Bottom Layer w0.153: v1(6,-12.2) 16.8,-12.2 v1(17.9,-13.3)
PIN73: J5_U_CPLD-V-HEADERBANK2.14 J6_U_CPLD-V-HEADERBANK2.5 J6_U_CPLD-V-HEADERBANK2.6 U1.73 | length 43
  Top Layer w0.153: U1.73@5,-18.495 5,-14.3 v1(6,-13.3) ; v1(17.001,-14.4) 17.001,-12.568 22.485,-7.084 22.485,-2.195 23.38,-1.3 25.37,-1.3 J5_U_CPLD-V-HEADERBANK2.14@26.67,0 J6_U_CPLD-V-HEADERBANK2.6@30.48,0 J6_U_CPLD-V-HEADERBANK2.5@33.02,0
  Bottom Layer w0.153: v1(6,-13.3) 15.901,-13.3 v1(17.001,-14.4)
PIN74: J5_U_CPLD-V-HEADERBANK2.12 J6_U_CPLD-V-HEADERBANK2.7 J6_U_CPLD-V-HEADERBANK2.8 U1.74 | length 43.4
  Top Layer w0.153: U1.74@5.5,-18.495 5.5,-17.134 5.321,-16.956 5.321,-16.179 v1(6,-15.5) ; v1(16.121,-15.5) 16.121,-13.017 22.18,-6.958 22.18,0.107 23.373,1.3 25.43,1.3 J5_U_CPLD-V-HEADERBANK2.12@26.67,2.54 J6_U_CPLD-V-HEADERBANK2.8@30.48,2.54 J6_U_CPLD-V-HEADERBANK2.7@33.02,2.54
  Bottom Layer w0.153: v1(6,-15.5) v1(16.121,-15.5)
PIN75: J5_U_CPLD-V-HEADERBANK2.10 J6_U_CPLD-V-HEADERBANK2.9 J6_U_CPLD-V-HEADERBANK2.10 U1.75 | length 45.2
  Top Layer w0.153: U1.75@6,-18.495 v1(6,-16.6) ; v1(15.137,-16.6) 15.137,-13.569 21.875,-6.831 21.875,2.575 23.2,3.9 25.49,3.9 J5_U_CPLD-V-HEADERBANK2.10@26.67,5.08 J6_U_CPLD-V-HEADERBANK2.10@30.48,5.08 J6_U_CPLD-V-HEADERBANK2.9@33.02,5.08
  Bottom Layer w0.153: v1(6,-16.6) v1(15.137,-16.6)
PIN76: J5_U_CPLD-V-HEADERBANK2.8 J6_U_CPLD-V-HEADERBANK2.11 J6_U_CPLD-V-HEADERBANK2.12 U1.76 | length 47.6
  Top Layer w0.153: U1.76@7.7,-16.795 7.7,-17.3 9.81,-19.41 12.312,-19.41 13.853,-19.41 14.458,-18.804 14.458,-17.264 14.458,-13.817 21.57,-6.705 21.57,4.816 23.154,6.4 25.45,6.4 J5_U_CPLD-V-HEADERBANK2.8@26.67,7.62 J6_U_CPLD-V-HEADERBANK2.12@30.48,7.62 J6_U_CPLD-V-HEADERBANK2.11@33.02,7.62
PIN77: J5_U_CPLD-V-HEADERBANK2.6 J6_U_CPLD-V-HEADERBANK2.13 J6_U_CPLD-V-HEADERBANK2.14 U1.77 | length 50.3
  Top Layer w0.153: U1.77@7.7,-16.295 8.729,-16.295 9.31,-16.876 9.31,-17.851 9.31,-18.341 9.974,-19.005 10.074,-19.105 12.186,-19.105 13.726,-19.105 14.153,-18.678 14.153,-17.137 14.153,-13.69 21.265,-6.579 21.265,6.965 23.2,8.9 25.41,8.9 J5_U_CPLD-V-HEADERBANK2.6@26.67,10.16 J6_U_CPLD-V-HEADERBANK2.14@30.48,10.16 J6_U_CPLD-V-HEADERBANK2.13@33.02,10.16
PIN78: J5_U_CPLD-V-HEADERBANK2.4 J6_U_CPLD-V-HEADERBANK2.15 J6_U_CPLD-V-HEADERBANK2.16 U1.78 | length 52.6
  Top Layer w0.153: U1.78@7.7,-15.795 8.73,-15.795 9.615,-16.681 9.615,-18.215 10.2,-18.8 13.6,-18.8 13.848,-18.552 13.848,-13.564 20.96,-6.452 20.96,9.16 23.2,11.4 25.37,11.4 J5_U_CPLD-V-HEADERBANK2.4@26.67,12.7 J6_U_CPLD-V-HEADERBANK2.16@30.48,12.7 J6_U_CPLD-V-HEADERBANK2.15@33.02,12.7
PIN81: J5_U_CPLD-V-HEADERBANK2.2 J6_U_CPLD-V-HEADERBANK2.17 J6_U_CPLD-V-HEADERBANK2.18 U1.81 | length 48
  Top Layer w0.153: U1.81@7.7,-14.295 9.305,-14.295 10.8,-12.8 14.181,-12.8 20.655,-6.326 20.655,11.521 23.034,13.9 25.33,13.9 J5_U_CPLD-V-HEADERBANK2.2@26.67,15.24 J6_U_CPLD-V-HEADERBANK2.18@30.48,15.24 J6_U_CPLD-V-HEADERBANK2.17@33.02,15.24
PIN82: J5_U_CPLD-V-HEADERBANK1.16 J6_U_CPLD-V-HEADERBANK1.3 J6_U_CPLD-V-HEADERBANK1.4 U1.82 | length 53.8
  Top Layer w0.153: U1.82@7.7,-13.795 9.374,-13.795 10.739,-12.43 14.089,-12.43 20.35,-6.169 20.35,-5.569 20.35,-4.723 20.35,16.54 J5_U_CPLD-V-HEADERBANK1.16@26.67,22.86 J6_U_CPLD-V-HEADERBANK1.3@33.02,22.86
PIN83: J5_U_CPLD-V-HEADERBANK1.14 J6_U_CPLD-V-HEADERBANK1.5 J6_U_CPLD-V-HEADERBANK1.6 U1.83 | length 57.6
  Top Layer w0.153: U1.83@7.7,-13.295 9.413,-13.295 10.583,-12.125 13.963,-12.125 20.045,-6.043 20.045,-5.443 20.045,-4.597 20.045,21.645 22.5,24.1 25.37,24.1 J5_U_CPLD-V-HEADERBANK1.14@26.67,25.4 J6_U_CPLD-V-HEADERBANK1.6@30.48,25.4 J6_U_CPLD-V-HEADERBANK1.5@33.02,25.4
PIN84: J5_U_CPLD-V-HEADERBANK1.12 J6_U_CPLD-V-HEADERBANK1.7 J6_U_CPLD-V-HEADERBANK1.8 U1.84 | length 59.7
  Top Layer w0.153: U1.84@7.7,-12.795 9.447,-12.795 10.422,-11.82 13.837,-11.82 19.74,-5.917 19.74,-5.317 19.74,-4.47 19.74,24.04 22.4,26.7 25.43,26.7 J5_U_CPLD-V-HEADERBANK1.12@26.67,27.94 J6_U_CPLD-V-HEADERBANK1.8@30.48,27.94 J6_U_CPLD-V-HEADERBANK1.7@33.02,27.94
PIN85: J5_U_CPLD-V-HEADERBANK1.10 J6_U_CPLD-V-HEADERBANK1.9 J6_U_CPLD-V-HEADERBANK1.10 U1.85 | length 61.9
  Top Layer w0.153: U1.85@7.7,-12.295 9.481,-12.295 10.261,-11.515 13.71,-11.515 19.435,-5.79 19.435,-5.19 19.435,-4.344 19.435,26.416 22.219,29.2 25.39,29.2 J5_U_CPLD-V-HEADERBANK1.10@26.67,30.48 J6_U_CPLD-V-HEADERBANK1.10@30.48,30.48 J6_U_CPLD-V-HEADERBANK1.9@33.02,30.48
PIN86: J5_U_CPLD-V-HEADERBANK1.8 J6_U_CPLD-V-HEADERBANK1.11 J6_U_CPLD-V-HEADERBANK1.12 U1.86 | length 64
  Top Layer w0.153: U1.86@7.7,-11.795 9.516,-11.795 10.101,-11.21 13.584,-11.21 19.13,-5.664 19.13,-5.064 19.13,-4.218 19.13,28.63 22.256,31.756 25.406,31.756 J5_U_CPLD-V-HEADERBANK1.8@26.67,33.02 J6_U_CPLD-V-HEADERBANK1.12@30.48,33.02 J6_U_CPLD-V-HEADERBANK1.11@33.02,33.02
PIN87: J5_U_CPLD-V-HEADERBANK1.6 J6_U_CPLD-V-HEADERBANK1.13 J6_U_CPLD-V-HEADERBANK1.14 U1.87 | length 66.2
  Top Layer w0.153: U1.87@7.7,-11.295 9.55,-11.295 9.94,-10.905 13.458,-10.905 18.825,-5.538 18.825,-4.938 18.825,-4.091 18.825,31.158 21.967,34.3 25.41,34.3 J5_U_CPLD-V-HEADERBANK1.6@26.67,35.56 J6_U_CPLD-V-HEADERBANK1.14@30.48,35.56 J6_U_CPLD-V-HEADERBANK1.13@33.02,35.56
PIN88: J5_U_CPLD-V-HEADERBANK1.4 J6_U_CPLD-V-HEADERBANK1.15 J6_U_CPLD-V-HEADERBANK1.16 U1.88 | length 68.3
  Top Layer w0.153: U1.88@7.7,-10.795 9.584,-10.795 9.779,-10.6 13.331,-10.6 18.52,-5.411 18.52,-4.811 18.52,-3.965 18.52,33.393 21.927,36.8 25.37,36.8 J5_U_CPLD-V-HEADERBANK1.4@26.67,38.1 J6_U_CPLD-V-HEADERBANK1.16@30.48,38.1 J6_U_CPLD-V-HEADERBANK1.15@33.02,38.1
PIN89: J5_U_CPLD-V-HEADERBANK1.2 J6_U_CPLD-V-HEADERBANK1.17 J6_U_CPLD-V-HEADERBANK1.18 U1.89 | length 70.3
  Top Layer w0.153: U1.89@7.7,-10.295 13.205,-10.295 18.215,-5.285 18.215,35.415 22.2,39.4 25.43,39.4 J5_U_CPLD-V-HEADERBANK1.2@26.67,40.64 J6_U_CPLD-V-HEADERBANK1.18@30.48,40.64 J6_U_CPLD-V-HEADERBANK1.17@33.02,40.64
R\D\: U1.92 U2.28 | length 59.9
  Top Layer w0.153: U2.28@-12.05,27.714 -12,27.764 -7.933,27.764 -7.825,27.872 -7.5,28.198 v1(-7.5,28.4) ; v1(7.3,4.173) 7.3,2.4 12.6,-2.9 12.6,-3.901 13.4,-4.701 13.4,-8.4 13.005,-8.795 U1.92@7.7,-8.795
  Bottom Layer w0.153: v1(-7.5,28.4) -8.179,27.721 -8.179,26.619 -7.738,26.178 -6.382,26.178 -2.478,26.179 2.011,21.689 2.011,14.848 7.3,9.56 v1(7.3,4.173)
R\X\F\: R60.1 U2.26 | length 51.7
  Top Layer w0.153: U2.26@-12.05,28.714 -9.67,28.714 -9.043,29.341 -9.043,29.857 v1(-8.9,30) ; v1(13.8,-1) 14.7,-1.9 15.3,-1.9 16,-2.6 R60.1@16,-3.41
  Bottom Layer w0.153: v1(-8.9,30) -8.221,30.679 -5.684,30.679 4.571,20.423 4.571,13.582 8.81,9.344 8.81,2.69 12.5,-1 v1(13.8,-1)
T\X\E\: R61.1 U2.27 | length 55.4
  Top Layer w0.153: U2.27@-12.05,28.214 -8.742,28.214 -7.636,29.321 -7.636,29.864 v1(-7.5,30) ; v1(13,0.2) 12.963,0.163 12.963,-2.163 R61.1@14.105,-3.305
  Bottom Layer w0.153: v1(-7.5,30) -5.437,30 2.621,21.941 2.621,15.101 8.505,9.217 8.505,2.564 12.747,-1.679 14.081,-1.679 14.479,-1.281 14.479,-0.379 13.93,0.17 13.03,0.17 v1(13,0.2)
TCK/SK: U2.38 U6.13 | length 25
  Top Layer w0.153: v1(-14,16.8) -12.717,18.083 -12.717,19.757 U6.13@-12.735,19.775 ; U2.38@-7.6,23.764 -7.6,25.822 -6.2,27.222 v1(-6.2,28.4)
  Layer 2 w0.153: v1(-14,16.8) -14,16.96 -14.679,17.638 -14.679,18.281 -14.16,18.8 -12.64,18.8 -6.821,24.619 -6.821,27.779 v1(-6.2,28.4)
TDI/DO: U2.39 U6.5 | length 24.1
  Top Layer w0.153: U6.5@-11.465,14.325 -11.32,14.47 -11.32,15.28 v1(-10.8,15.8) ; U2.39@-7.1,23.764 -7.1,25.891 -5.8,27.191 -5.8,27.4 v1(-4.8,28.4)
  Layer 2 w0.153: v1(-10.8,15.8) -10.879,15.879 -10.879,18.952 -5.671,24.159 -5.606,24.224 -4.245,24.224 -3.858,24.61 -3.858,27.458 v1(-4.8,28.4)
TDO/DI: U2.40 U6.4 | length 19
  Top Layer w0.153: U6.4@-12.735,14.325 -12.735,15.265 -12.3,15.7 v1(-12.3,15.8) ; U2.40@-6.6,23.764 -6.6,25.02 -6.779,25.199 -6.779,25.781 -6.36,26.2 -5.5,26.2 v1(-4.8,25.5)
  Layer 2 w0.153: v1(-12.3,15.8) -11.184,16.916 -11.184,19.116 v1(-4.8,25.5)
TMCS/CS: U2.41 U6.14 | length 15
  Top Layer w0.153: U6.14@-14.005,19.775 -14.005,18.395 -14.137,18.263 -14.137,18.137 v1(-14,18) ; U2.41@-6.1,23.764 v1(-6.1,25.5)
  Layer 2 w0.153: v1(-14,18) -13.921,18.079 -12.931,18.079 -6.189,24.82 -6.189,25.411 v1(-6.1,25.5)
W\R\: U1.95 U2.29 | length 49.8
  Top Layer w0.153: U2.29@-12.05,27.214 -9.365,27.214 -9.051,26.9 v1(-7.5,26.9) ; U1.95@7.7,-7.295 7.024,-7.295 6.878,-7.148 6.824,-7.148 6.5,-6.824 6.5,-4.3 6.9,-3.9 6.9,-1.5 8.2,-0.2 v1(8.2,0)
  Bottom Layer w0.153: v1(-7.5,26.9) -2.769,26.9 2.316,21.815 2.316,14.974 8.2,9.091 v1(8.2,0)
pads on no net: J2.6 J2.7 J2.8 SW9.M1 SW9.M2 SW10.M1 SW10.M2
copper on no net:
  other v1: -25.4,-6.35

## Polygon pours and split planes (outlines as drawn)
GND on Layer 1 "GND" (solid, remove dead copper, pour order 0): 34.925,-53.975 34.925,53.975 -34.925,53.975 -34.925,-53.975
P3V3D on Layer 2 "P3V3D" (solid, remove dead copper, pour order 2): -35.4,-54.4 -35.4,54.3 35.4,54.3 35.4,-54.4
GND on Bottom Layer "GND_TOP" (solid, remove dead copper, pour order 3): -34.925,-53.975 -34.925,53.975 34.925,53.975 34.925,-53.975
GND on Top Layer "GND_TOP" (solid, remove dead copper, pour order 1): -34.925,-53.975 -34.925,53.975 34.925,53.975 34.925,-53.975

## Keep-outs
Keep-Out Layer:
  the board outline again, w0.25

## Other copper
Top Layer:
  region net P1V8D: 8.128,18.288 9.652,18.288 cw(c9.652,17.78) 10.16,17.78 10.16,15.24 ccw(c10.668,15.24) 10.668,14.732 17.272,14.732 ccw(c17.272,15.24) 17.78,15.24 17.78,23.876 ccw(c17.272,23.876) 17.272,24.384 10.668,24.384 ccw(c10.668,23.876) 10.16,23.876 10.16,19.812 cw(c9.652,19.812) 9.652,19.304 9.144,19.304
  region net P3V3D: 8.128,31.496 9.652,31.496 ccw(c9.652,32.004) 10.16,32.004 10.16,34.544 cw(c10.668,34.544) 10.668,35.052 17.272,35.052 cw(c17.272,34.544) 17.78,34.544 17.78,25.908 cw(c17.272,25.908) 17.272,25.4 10.668,25.4 cw(c10.668,25.908) 10.16,25.908 10.16,29.972 ccw(c9.652,29.972) 9.652,30.48 9.144,30.48
Layer 1:
  region net P3V3D: 10.668,35.052 ccw(c10.668,34.544) 10.16,34.544 10.16,25.908 ccw(c10.668,25.908) 10.668,25.4 17.342,25.4 ccw(c17.342,25.838) 17.78,25.838 17.78,34.544 ccw(c17.272,34.544) 17.272,35.052
  region net P1V8D: 10.668,14.732 cw(c10.668,15.24) 10.16,15.24 10.16,23.876 cw(c10.668,23.876) 10.668,24.384 17.342,24.384 cw(c17.342,23.946) 17.78,23.946 17.78,15.24 cw(c17.272,15.24) 17.272,14.732
Layer 2:
  region net P1V8D: 10.668,14.732 cw(c10.668,15.24) 10.16,15.24 10.16,23.876 cw(c10.668,23.876) 10.668,24.384 17.342,24.384 cw(c17.342,23.946) 17.78,23.946 17.78,15.24 cw(c17.272,15.24) 17.272,14.732
  region net P3V3D: 10.668,35.052 ccw(c10.668,34.544) 10.16,34.544 10.16,25.908 ccw(c10.668,25.908) 10.668,25.4 17.342,25.4 ccw(c17.342,25.838) 17.78,25.838 17.78,34.544 ccw(c17.272,34.544) 17.272,35.052
Bottom Layer:
  region net P1V8D: 10.668,14.732 cw(c10.668,15.24) 10.16,15.24 10.16,23.876 cw(c10.668,23.876) 10.668,24.384 17.342,24.384 cw(c17.342,23.946) 17.78,23.946 17.78,15.24 cw(c17.272,15.24) 17.272,14.732
  region net P3V3D: 10.668,35.052 ccw(c10.668,34.544) 10.16,34.544 10.16,25.908 ccw(c10.668,25.908) 10.668,25.4 17.342,25.4 ccw(c17.342,25.838) 17.78,25.838 17.78,34.544 ccw(c17.272,34.544) 17.272,35.052

## Silkscreen, mask and mechanical layers (free items; w line width, h text height)
Top Overlay:
  drawing of 667 lines, arcs and shapes, not listed
  text "3V3" at -28.956,42.164 h2
  text "GND" at 25.368,42.164 h1.8
  text "+5V IN" at 3.485,40.254 h3
  text "PROG" at -14.844,40.085 h3 r90
  text "28" at -22.606,39.624 h2
  text "89" at 19.05,39.624 h2
  text "29" at -22.606,37.084 h2
  text "88" at 19.05,37.084 h2
  text "30" at -22.606,34.544 h2
  text "87" at 19.05,34.544 h2
  text "33" at -22.606,32.004 h2
  text "86" at 19.05,32.004 h2
  text "34" at -22.606,29.464 h2
  text "85" at 19.05,29.464 h2
  text "35" at -22.606,26.924 h2
  text "84" at 19.05,26.924 h2
  text "36" at -22.606,24.384 h2
  text "83" at 19.05,24.384 h2
  text "37" at -22.606,21.844 h2
  text "82" at 19.05,21.844 h2
  text "GND" at -29.076,19.304 h1.8
  text "3V3" at 25.4,19.304 h2
  text "3V3" at -28.956,16.764 h2
  text "GND" at 25.368,16.764 h1.8
  text "38" at -22.606,14.224 h2
  text "81" at 19.05,14.224 h2
  text "39" at -22.606,11.684 h2
  text "78" at 19.05,11.684 h2
  text "40" at -22.606,9.144 h2
  text "77" at 19.05,9.144 h2
  text "41" at -22.606,6.604 h2
  text "76" at 19.05,6.604 h2
  text "42" at -22.606,4.064 h2
  text "JTAG" at -17.78,4.064 h3
  text "75" at 19.05,4.064 h2
  text "47" at -22.606,1.524 h2
  text "74" at 19.05,1.524 h2
  text "48" at -22.606,-1.016 h2
  text "73" at 19.05,-1.016 h2
  text "49" at -22.606,-3.556 h2
  text "72" at 19.05,-3.556 h2
  text "GND" at -29.076,-6.096 h1.8
  text "3V3" at 25.4,-6.096 h2
  text "3V3" at -28.956,-8.636 h2
  text "GND" at 25.368,-8.636 h1.8
  text "50" at -22.606,-11.176 h2
  text "71" at 19.05,-11.176 h2
  text "51" at -22.606,-13.716 h2
  text "70" at 19.05,-13.716 h2
  text "52" at -22.606,-16.256 h2
  text "69" at 19.05,-16.256 h2
  text "53" at -22.606,-18.796 h2
  text "68" at 19.05,-18.796 h2
  text "54" at -22.606,-21.336 h2
  text "67" at 19.05,-21.336 h2
  text "55" at -22.606,-23.876 h2
  text "66" at 19.05,-23.876 h2
  text "CIRCUITSONLINE.NET" at -14.5,-26.064 h4
  text "56" at -22.606,-26.416 h2
  text "61" at 19.05,-26.416 h2
  text "SILICONVALLEYGARAGE" at -10.947,-28.852 h2.8
  text "57" at -22.606,-28.956 h2
  text "58" at 19.05,-28.956 h2
  text "GND" at -29.075,-31.496 h1.8
  text "3V3" at 25.4,-31.496 h2
  text "MAX V CPLD" at -6.075,-34.608 h3
  text "7" at -11.21,-53.327 h2
  text "1" at 11.65,-53.327 h2
  text "8" at -15.02,-53.341 h2
  text "6" at -7.4,-53.341 h2
  text "5" at -3.59,-53.332 h2
  text "4" at 0.22,-53.327 h2
  text "3" at 4.03,-53.341 h2
  text "2" at 7.84,-53.332 h2
Top Courtyard:
  circle w0.05: c0,0 r0.635
  lines w0.05: -0.635,0 0,0 ; 0,-0.635 0,0 ; 0,0.635 0,0 ; 0.635,0 0,0
  lines w0.2: 32.27,-31.23 33.77,-29.73 ; -33.77,42.43 -32.27,43.93 -33.77,42.43
Top Assembly:
  lines w0.05: -34.925,-50.165 ccw(c-31.115,-50.165) -31.115,-53.975 0.635,-53.975 31.115,-53.975 ccw(c31.115,-50.165) 34.925,-50.165 34.925,50.165 ccw(c31.115,50.165) 31.115,53.975 -31.115,53.975 ccw(c-31.115,50.165) -34.925,50.165 -34.925,-50.165

## Text inside footprints (layer, text, board x,y; h text height)
D1: Top Assembly "K" at 13.735,-41.225 h0.5 r90
D2: Top Assembly "K" at 9.925,-41.225 h0.5 r90
D3: Top Assembly "K" at 6.115,-41.225 h0.5 r90
D4: Top Assembly "K" at 2.305,-41.225 h0.5 r90
D5: Top Assembly "K" at -1.505,-41.225 h0.5 r90
D6: Top Assembly "K" at -5.315,-41.225 h0.5 r90
D7: Top Assembly "K" at -9.125,-41.225 h0.5 r90
D8: Top Assembly "K" at -12.935,-41.225 h0.5 r90
D9: Top Assembly "K" at -14.008,8.236 h0.5
D10: Top Assembly "K" at 7.525,23.993 h0.5
J2: Mechanical 13 "1" at -4.33,6.205 h0.3 r90
LOGO1: Top Overlay "PUBLIC / DOMAIN" at -28.838,48.098 h2.5; Top Overlay "0" at -31.979,48.548 h5
U1: Top Assembly "1" at 5.876,-2.326 h0.3 r270
U2: Top Assembly "1" at -2.75,35.914 h0.3 r270
U3: Mechanical 13 "1" at 7.076,32.788 h0.3
U4: Top Assembly "1" at -1.175,19.775 h0.3 r270
U5: Mechanical 13 "1" at 7.076,20.596 h0.3
U6: Top Assembly "1" at -16.245,13.6 h0.3 r90